# Altium PCB SWC_PCBp1.PcbDoc
Units mm, origin at the board's own origin, x right, y up, seen from the top; angles counter-clockwise.
Board outline 45 x 51 mm, 2 copper layers (Top Layer, Bottom Layer); 74 components, 51 nets, 201 pads, 40 vias.
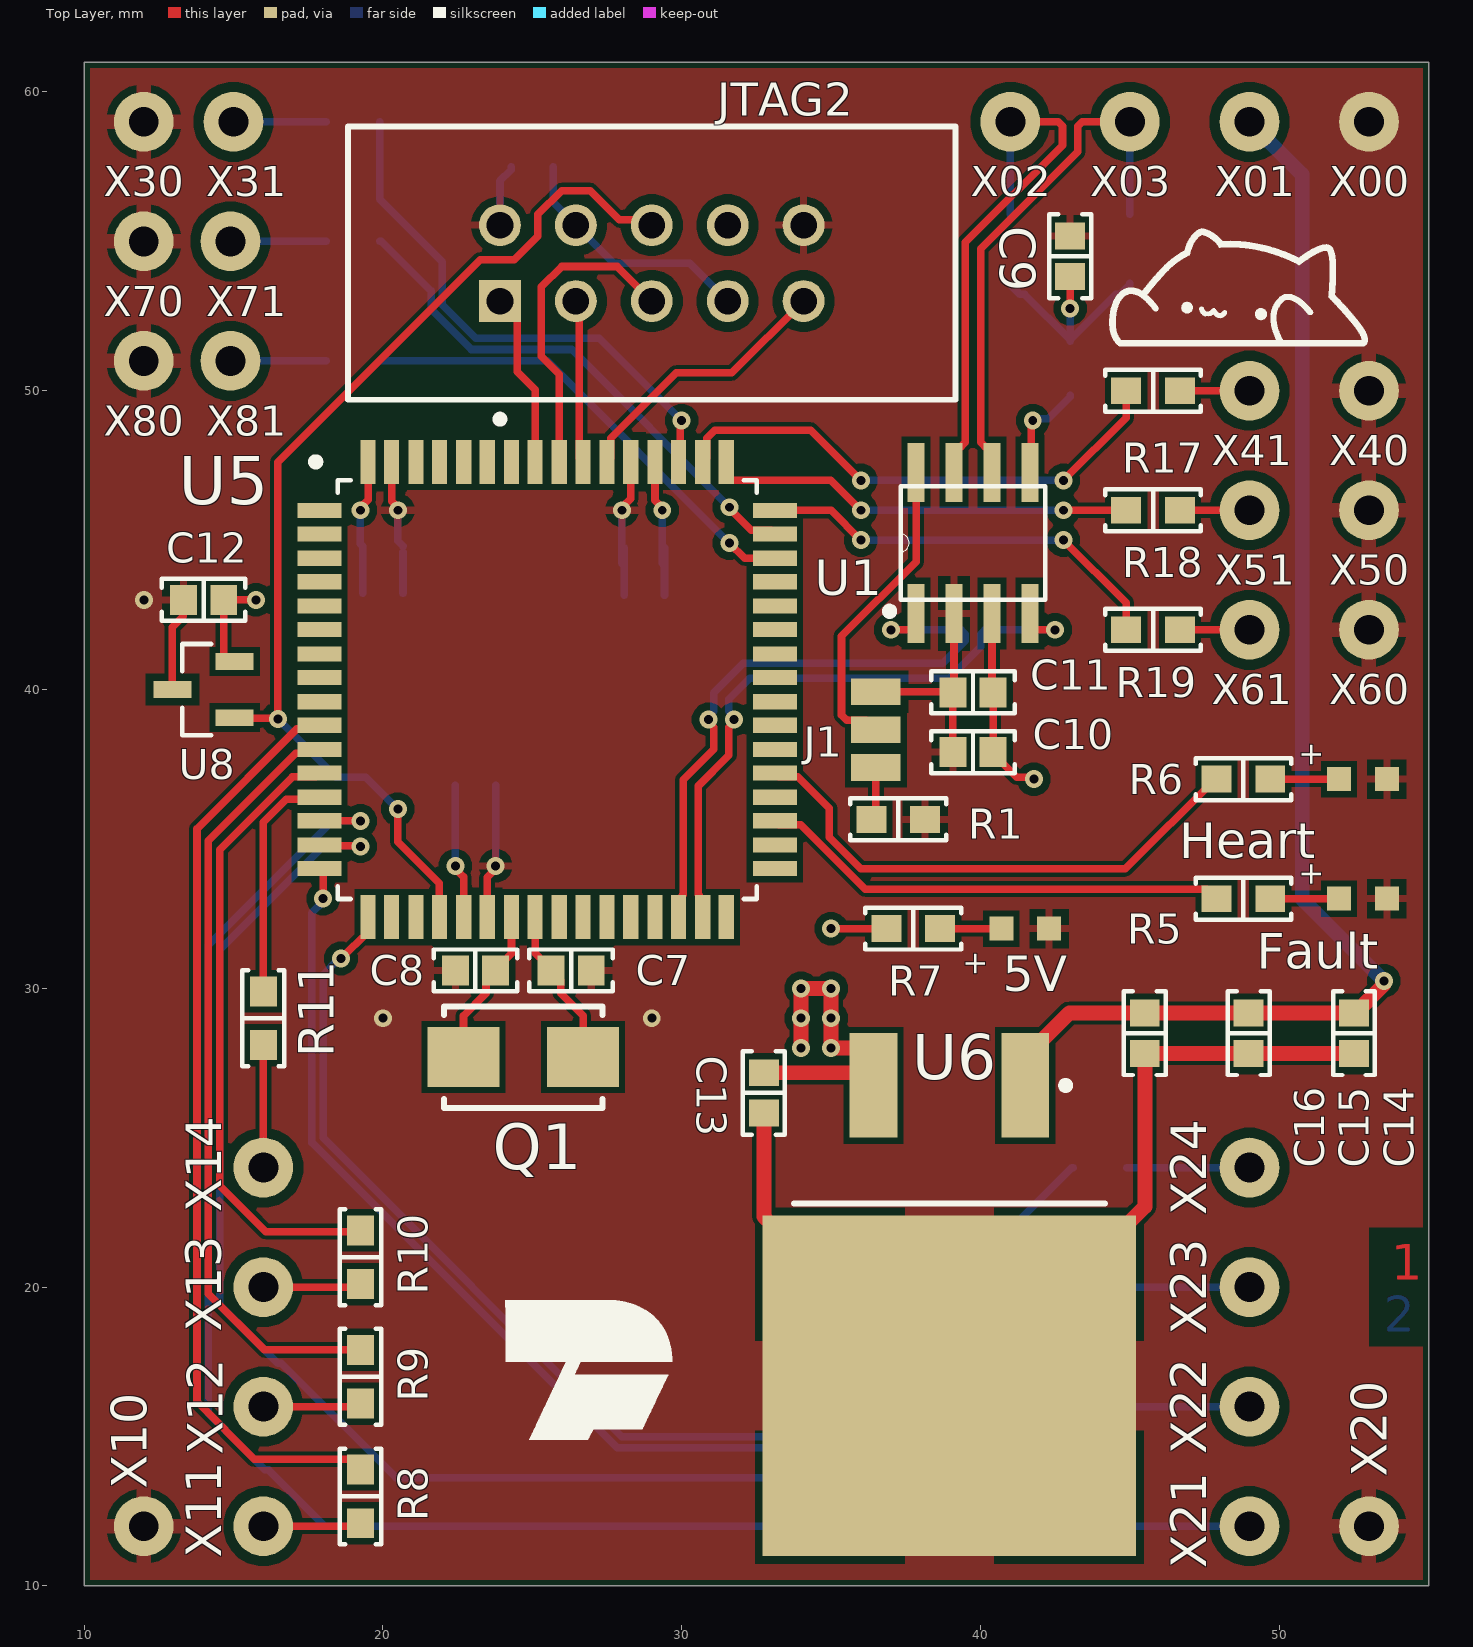
[diagram p0: Top Layer view]
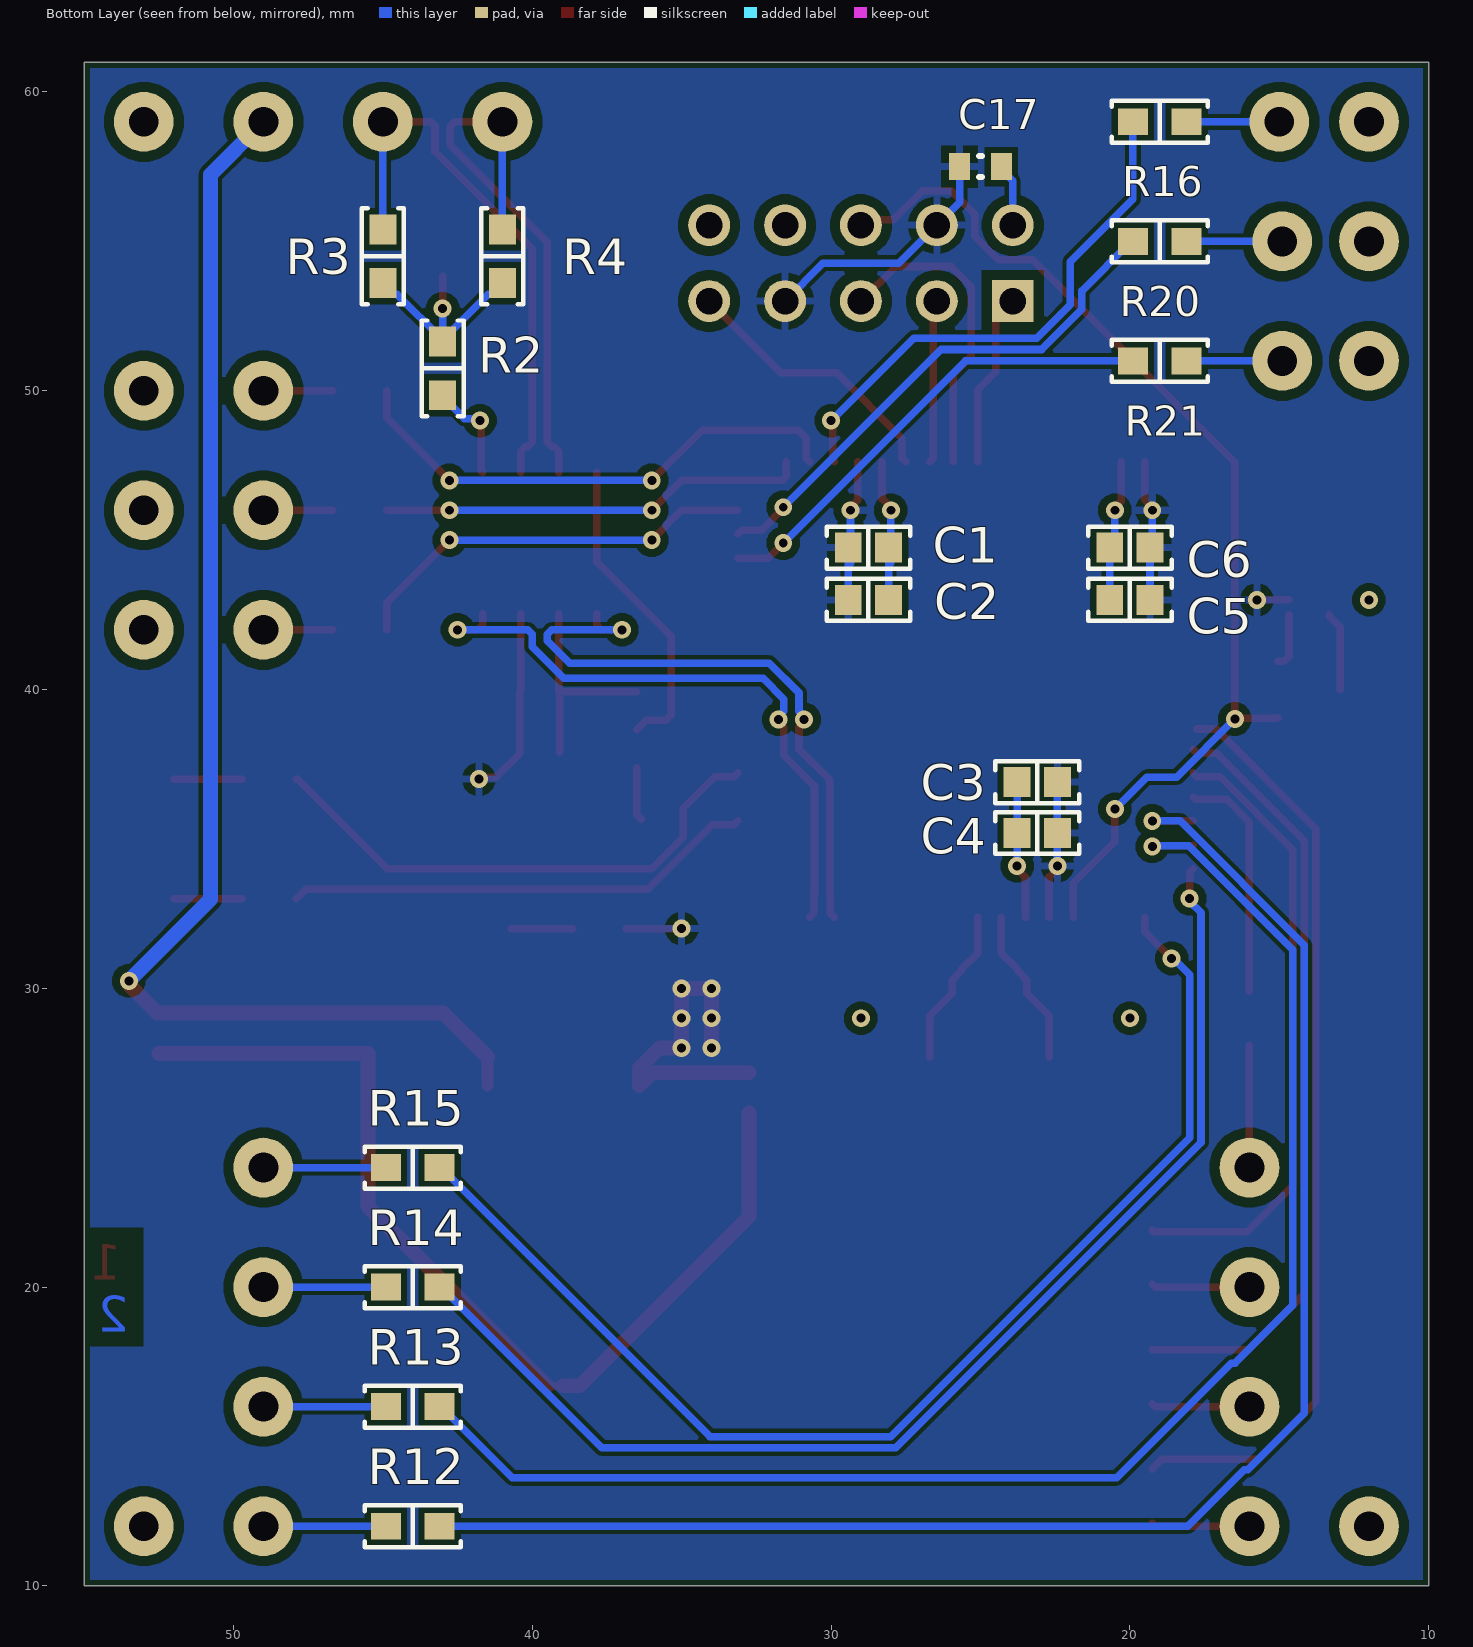
[diagram p1: Bottom Layer view, seen from below]
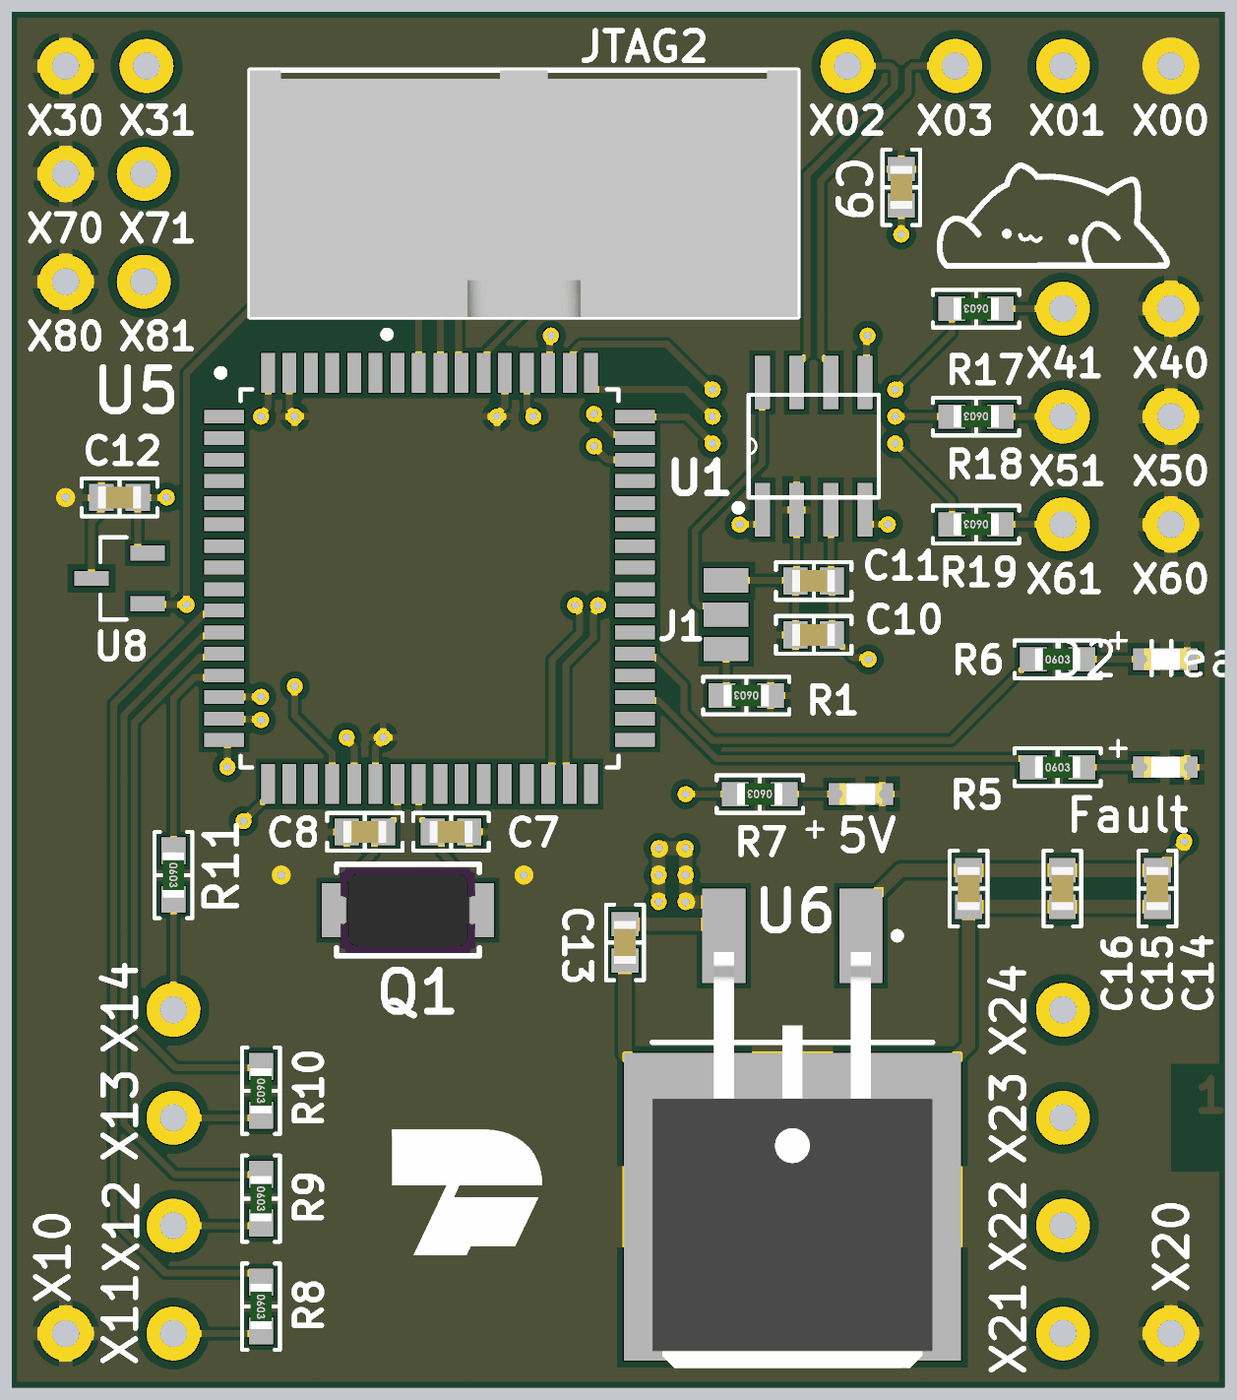
[diagram p2: 3D render of the assembled board from above, using the file's embedded part models]
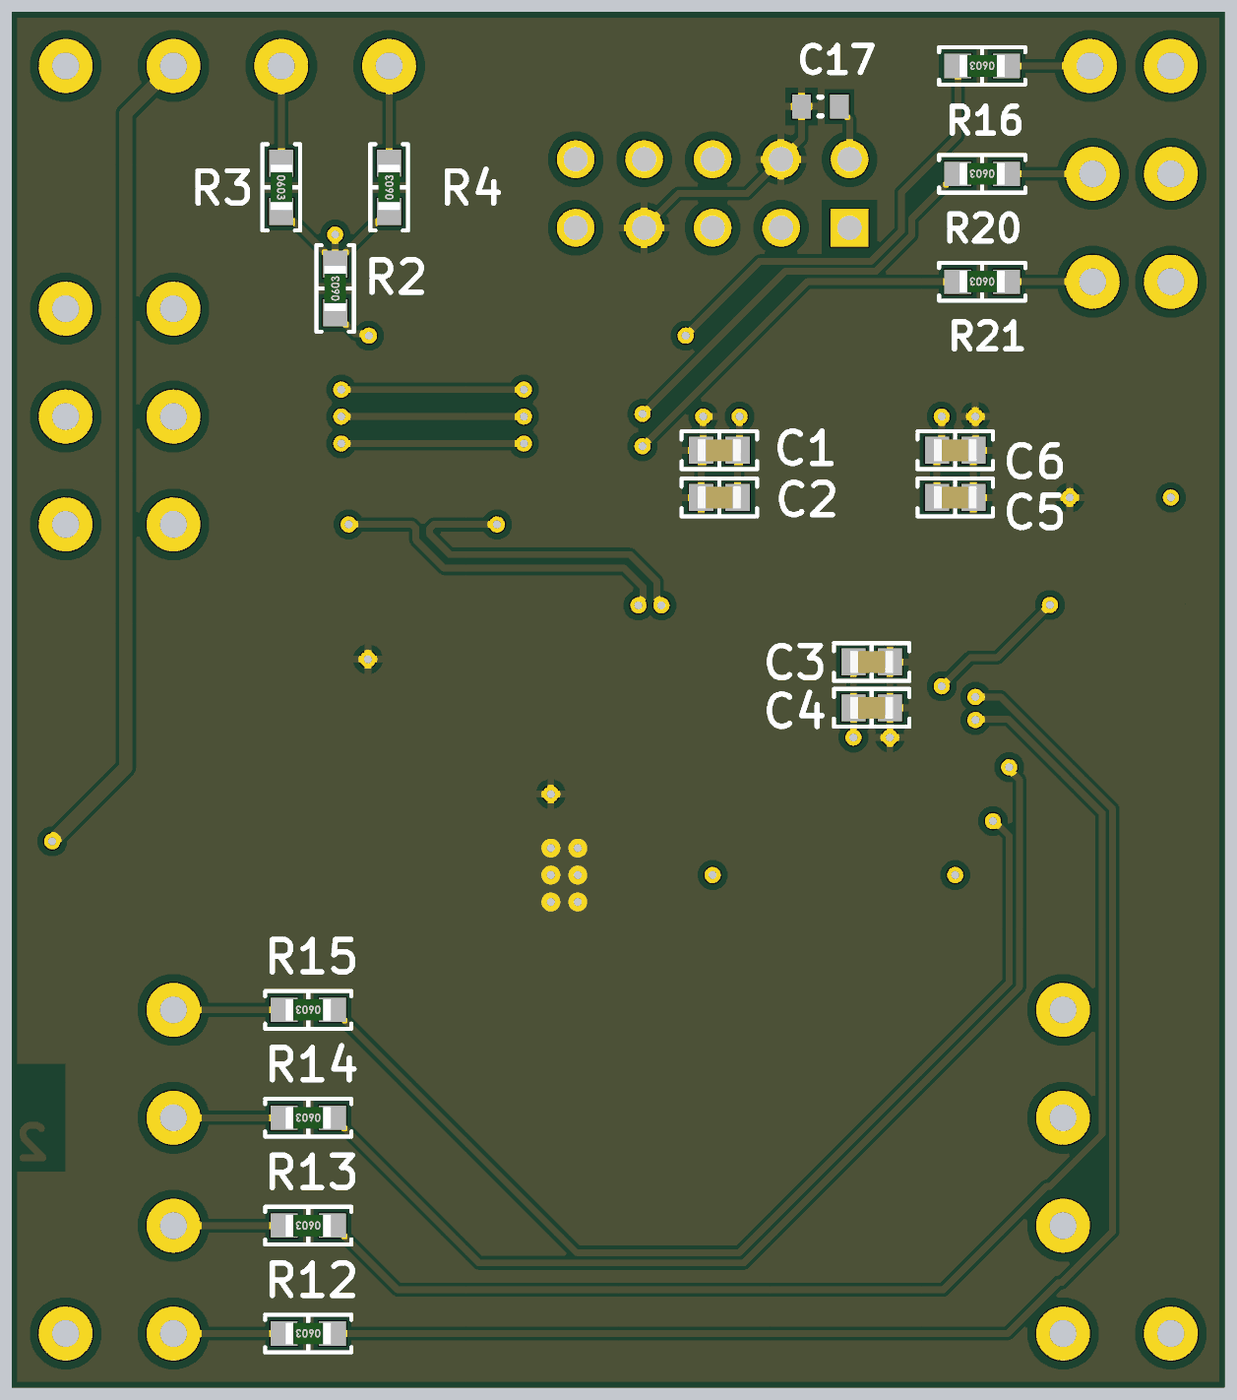
[diagram p3: 3D render of the assembled board from below, using the file's embedded part models]

## Layer stack, top to bottom
Top Solder: solder mask 0.0102, Solder Resist, Dk 3.5
Top Layer: signal copper 0.0356
Dielectric 1: dielectric 0.32, FR-4, Dk 4.8
Bottom Layer: signal copper 0.0356
Bottom Solder: solder mask 0.0102, Solder Resist, Dk 3.5

## Board outline
10,10 55,10 55,61 10,61

## Design rules (kind name [scope] priority, off if disabled: settings)
BoardOutlineClearance [All] p1: gap=0.2 ignorepadtopadclearanceinfootprint=FALSE // Trace to V-cut >0.4mm
Clearance [All] p1: gap=0.254 ignorepadtopadclearanceinfootprint=TRUE except(0: Arc-Hole Track-Hole SMDPad-Hole THPad-Hole Via-Hole Fill-Hole Poly-Hole Region-Hole Text-Hole; 0.127: Arc-Arc Arc-Track Arc-Fill Arc-Poly Arc-Region Track-Track Track-Fill Track-Poly Track-Region SMDPad-SMDPad; 0.15: Arc-Text Track-Text SMDPad-Text THPad-Text Via-Text Fill-Text Poly-Text Region-Text Text-Text; 0.2: Arc-SMDPad Track-SMDPad SMDPad-Fill SMDPad-Poly SMDPad-Region; 0.33: Arc-THPad Track-THPad THPad-Fill THPad-Poly THPad-Region; 0.5: SMDPad-THPad THPad-THPad THPad-Via)
DiffPairsRouting [All] p1: maxlimit=10 minlimit=0.254 mostfreqgap=0.254 toplayer_minwidth=0.127 toplayer_maxwidth=5 toplayer_prefwidth=0.254 bottomlayer_minwidth=0.127 bottomlayer_maxwidth=5 bottomlayer_prefwidth=0.254 maxuncoupledlength=12.7
HoleSize [All] p1: absolutevalues=TRUE maxlimit=6.3 minlimit=0.2 maxpercent=80.000 minpercent=20.000 // Finished hole size tolerance +0.13/-0.08mm
HoleToHoleClearance [All] p1: gap=0.5 allowstackedmicrovias=TRUE
MinimumAnnularRing [All] p1: minimumring=0.13 // 1oz Copper
PolygonConnect [All] p1: connectstyle=Relief reliefconductorwidth=0.254 reliefentries=4 polygonreliefangle="90 Angle" airgapwidth=0.254
RoutingVias [All] p1: holewidth=0.711 width=1.27 viastyle="Through Hole" minholewidth=0.3 minwidth=0.6 maxholewidth=0.711 maxwidth=1.27
SolderMaskExpansion [All] p1: expansion=0.05 istentingtop=FALSE
Width [All] p1: maxlimit=4.5 minlimit=0.127 preferedwidth=0.254 minimp=50.000000 maximp=50.000000 favimp=50.000000
27 further rules are at their usual default settings.

## Classes and differential pairs
component class SWC_P01: 5V C1 C2 C3 C4 C5 C6 C7 C8 C10 C11 C14 C16 Fault Heart J1 JTAG2 Q1 R1 R2 R4 R5 R6 R7 R8 R9 R10 R11 R12 R13 R15 R19 R21 U1 U5 U6 U8 X00 X01 X02 X03 X10 X13 X14 X23 X24 X30 X31 X40 X41 X50 X51 X60 X61 X70 X71 X80 X81
differential pair X_CAN: +X_CAN_P -X_CAN_N
differential pair CAN: +CAN_P -CAN_N

## Components (designator, comment, footprint, x,y, rotation, side; value= is the part's Value field where it differs from the comment)
5V "Green, 3.2V, 150060GS75000" WL-SMCW_0603_H=0.7mm 41.5,32 r180 top (schematic designator D3)
C1 "SMD Capacitor" "CAP 0603/1608" 28.75,44.75 r0 bottom value=1uF
C2 "SMD Capacitor" "CAP 0603/1608" 28.75,43 r0 bottom value=100nF
C3 "SMD Capacitor" "CAP 0603/1608" 23.1,36.9 r180 bottom value=1uF
C4 "SMD Capacitor" "CAP 0603/1608" 23.1,35.2 r180 bottom value=100nF
C5 "SMD Capacitor" "CAP 0603/1608" 20,43 r180 bottom value=1uF
C6 "SMD Capacitor" "CAP 0603/1608" 20,44.75 r180 bottom value=100nF
C7 "SMD Capacitor" "CAP 0603/1608" 26.3,30.6 r180 top value=18pF
C8 "SMD Capacitor" "CAP 0603/1608" 23.1,30.6 r0 top value=18pF
C9 "SMD Capacitor" "CAP 0603/1608" 43,54.5 r90 top value=4u7
C10 "SMD Capacitor" "CAP 0603/1608" 39.75,37.905 r0 top value=100n
C11 "SMD Capacitor" "CAP 0603/1608" 39.75,39.905 r0 top value=100n
C12 "SMD Capacitor" "CAP 0603/1608" 14,43 r180 top value=1uF
C13 "SMD Capacitor" "CAP 0603/1608" 32.75,26.5 r270 top value=100nF
C14 "SMD Capacitor" "CAP 0603/1608" 52.5,28.5 r270 top value=100nF
C15 "SMD Capacitor" "CAP 0603/1608" 48.975,28.5 r270 top value=220nF
C16 "SMD Capacitor" "CAP 0603/1608" 45.5,28.5 r270 top value=10nF
C17 "CAP 100nF 10V 0603(1608)" CAPC0603(1608)100_L 25,57.5 r180 bottom value=100nF
Fault "Red, 2V, 150060RS75000" WL-SMCW_0603_H=0.7mm 52.8,33 r180 top (schematic designator "D1 Fault")
Heart "Blue, 3.2V, 150060BS75000" WL-SMCW_0603_H=0.7mm 52.8,37 r180 top (schematic designator "D2 Heart")
J1 "JUMPERID" SMD-JUMPER-3 36.5,38.655 r270 top net-tie
JTAG2 "5103309-1" TECO-5103309-1_V 29,54.27 r180 top
Q1 "16M" "NDK NX5032GA" 24.7,27.7 r180 top
R1 "SMD Resistor" "STACKPOLE CSR0603" 37.25,35.655 r180 top
R2 "SMD Resistor" "STACKPOLE CSR0603" 43,50.75 r90 bottom value=300
R3 "SMD Resistor" "STACKPOLE CSR0603" 45,54.5 r270 bottom value=60
R4 "SMD Resistor" "STACKPOLE CSR0603" 41,54.5 r90 bottom value=60
R5 "SMD Resistor" "STACKPOLE CSR0603" 48.8,33 r0 top value=1k
R6 "SMD Resistor" "STACKPOLE CSR0603" 48.8,37 r0 top value=1k
R7 "SMD Resistor" "STACKPOLE CSR0603" 37.75,32 r180 top value=1k
R8 "SMD Resistor" "STACKPOLE CSR0603" 19.25,13 r270 top value=10k
R9 "SMD Resistor" "STACKPOLE CSR0603" 19.25,17 r270 top value=10k
R10 "SMD Resistor" "STACKPOLE CSR0603" 19.25,21 r270 top value=10k
R11 "SMD Resistor" "STACKPOLE CSR0603" 16,29 r270 top value=10k
R12 "SMD Resistor" "STACKPOLE CSR0603" 44,12 r0 bottom value=10k
R13 "SMD Resistor" "STACKPOLE CSR0603" 44,16 r0 bottom value=10k
R14 "SMD Resistor" "STACKPOLE CSR0603" 44,20 r0 bottom value=10k
R15 "SMD Resistor" "STACKPOLE CSR0603" 44,24 r0 bottom value=10k
R16 "SMD Resistor" "STACKPOLE CSR0603" 19,59 r0 bottom value=10k
R17 "SMD Resistor" "STACKPOLE CSR0603" 45.775,50 r180 top value=10k
R18 "SMD Resistor" "STACKPOLE CSR0603" 45.775,46 r180 top value=10k
R19 "SMD Resistor" "STACKPOLE CSR0603" 45.775,42 r180 top value=10k
R20 "SMD Resistor" "STACKPOLE CSR0603" 19,55 r0 bottom value=10k
R21 "SMD Resistor" "STACKPOLE CSR0603" 19,51 r0 bottom value=10k
U1 "MCP2551-I/SN" *SOIC127P600X175-8N 39.75,44.905 r90 top
U5 "AT90CAN128-16AI" *QFP80P1600X1600X120-64N 25.5,40 r0 top
U6 "L7805ABD2T-TR" DPAK254P1542X460-3M 38.96,19.45 r270 top
U8 "MCP130T-450I/TT" *SOT95P237X112-3N 14,40 r90 top
X00 "SolderTerminal" SolderTerminal#1 53,59 r0 top
X01 "SolderTerminal" SolderTerminal#1 49,59 r0 top
X02 "SolderTerminal" SolderTerminal#1 41,59 r0 top
X03 "SolderTerminal" SolderTerminal#1 45,59 r0 top
X10 "SolderTerminal" SolderTerminal#1 12,12 r90 top
X11 "SolderTerminal" SolderTerminal#1 16,12 r90 top
X12 "SolderTerminal" SolderTerminal#1 16,16 r90 top
X13 "SolderTerminal" SolderTerminal#1 16,20 r90 top
X14 "SolderTerminal" SolderTerminal#1 16,24 r0 top
X20 "SolderTerminal" SolderTerminal#1 53,12 r0 top
X21 "SolderTerminal" SolderTerminal#1 49,12 r90 top
X22 "SolderTerminal" SolderTerminal#1 49,16 r90 top
X23 "SolderTerminal" SolderTerminal#1 49,20 r90 top
X24 "SolderTerminal" SolderTerminal#1 49,24 r90 top
X30 "SolderTerminal" SolderTerminal#1 12,59 r90 top
X31 "Button_Left" SolderTerminal#1 15,59 r0 top
X40 "SolderTerminal" SolderTerminal#1 53,50 r90 top
X41 "Button_Right" SolderTerminal#2 48.9,50 r0 top
X50 "SolderTerminal" SolderTerminal#1 53,46 r90 top
X51 "Switch1" SolderTerminal#1 49,46 r0 top
X60 "SolderTerminal" SolderTerminal#1 53,42 r90 top
X61 "Switch2" SolderTerminal#1 49,42 r0 top
X70 "SolderTerminal" SolderTerminal#1 12,55 r90 top
X71 "Switch3" SolderTerminal#1 14.9,55 r90 top
X80 "SolderTerminal" SolderTerminal#1 12,51 r90 top
X81 "Switch4" SolderTerminal#1 14.9,51 r90 top

## Footprints (in the part's own frame and the unit in brackets; to place one, negate y for a bottom-side part, rotate by r counter-clockwise, add the part's x,y. Pads: shape width x height; smd on the part's side, far side on the other; paste and mask are expansions set on the pad)
*QFP80P1600X1600X120-64N [mil]
  rect 58x20 smd: 1(-300,236) 2(-300,205) 3(-300,173) 4(-300,142) 5(-300,110) 6(-300,79) 7(-300,47) 8(-300,16) 9(-300,-16) 10(-300,-47) 11(-300,-79) 12(-300,-110) 13(-300,-142) 14(-300,-173) 15(-300,-205) 16(-300,-236) 33(300,-236) 34(300,-205) 35(300,-173) 36(300,-142) 37(300,-110) 38(300,-79) 39(300,-47) 40(300,-16) 41(300,16) 42(300,47) 43(300,79) 44(300,110) 45(300,142) 46(300,173) 47(300,205) 48(300,236)
  rect 20x58 smd: 17(-236,-300) 18(-205,-300) 19(-173,-300) 20(-142,-300) 21(-110,-300) 22(-79,-300) 23(-47,-300) 24(-16,-300) 25(16,-300) 26(47,-300) 27(79,-300) 28(110,-300) 29(142,-300) 30(173,-300) 31(205,-300) 32(236,-300) 49(236,300) 50(205,300) 51(173,300) 52(142,300) 53(110,300) 54(79,300) 55(47,300) 56(16,300) 57(-16,300) 58(-47,300) 59(-79,300) 60(-110,300) 61(-142,300) 62(-173,300) 63(-205,300) 64(-236,300)
  silkscreen extent -310,-276 276,305, body extent -270,-270 270,270, height 30
*SOIC127P600X175-8N [mil]
  rect 78x22 smd: 1(-93,75) 2(-93,25) 3(-93,-25) 4(-93,-75) 5(93,-75) 6(93,-25) 7(93,25) 8(93,75)
  silkscreen extent -95,-95 75,115, body extent -75,-95 75,95, height 80
*SOT95P237X112-3N [mil]
  rect 22x50 smd: 1(-37,-41) 2(37,-41) 3(0,41)
  silkscreen extent -60,-10 60,28, body extent -60,-25 60,25, height 50
"CAP 0603/1608" [mm] "Chip Capacitor, 2-Leads, Body 1.60x0.80mm, IPC Medium Density"
  rect 0.9x1 smd: 1(-0.675,0) 2(0.675,0)
  silkscreen extent -1.4,-0.7 1.4,0.7, body extent -0.8,-0.41 0.8,0.41, height 0.82
CAPC0603(1608)100_L [mm] "Chip Capacitor, Body 1.6x0.8mm, Height 1.0mm, IPC High Density"
  rect 0.7x0.9 smd: 1(-0.7,0) 2(0.7,0)
  silkscreen extent -0.05,-0.35 0.05,0.35, body extent -0.87,-0.47 0.88,0.48, height 1
DPAK254P1542X460-3M [mm] "D2-PAK, 3-Pads, Body 7,78x8,56mm (max), IPC Low Density"
  rect 3.5x1.6 smd: 1(-7.3,2.54) 3(-7.3,-2.54)
  rect 11.4x12.5 smd: 4(2.75,0)
  silkscreen extent -7.42,-5.2 -3.35,5.2, body extent -6.69,-5.2 8.73,5.2, height 4.63
"NDK NX5032GA" [mm] "Crystal, 2-Leads, Body 5.00x3.20mm, IPC Medium Density"
  rect 2.4x2 smd: 1(-2,0) 2(2,0)
  silkscreen extent -2.65,-1.7 2.65,1.7, body extent -2.5,-1.6 2.5,1.6, height 1.2
SMD-JUMPER-3 [mm] "Jumper, SMD"
  rect 0.9x1.65 smd: 1(-1.27,0) 2(0,0) 3(1.27,0)
SolderTerminal#1 [mm]
  round 2 hole 1: 1(0,0)
SolderTerminal#2 [mm]
  round 2 hole 1: 1(0.1,0)
"STACKPOLE CSR0603" [mm] "Chip Resistor, 2-Leads, Body 1.60x0.80mm, IPC Medium Density"
  rect 1x0.9 smd: 1(-0.9,0) 2(0.9,0)
  silkscreen extent -1.6,-0.7 1.6,0.7, body extent -0.85,-0.4 0.85,0.4, height 0.45
TECO-5103309-1_V [mm] "Male Header, 10-Leads, Body 20.32x9.144mm, Pitch 2.54mm"
  rect 1.4x1.4 hole 0.889: 1(5.08,1.27)
  round 1.4 hole 0.889: 2(5.08,-1.27) 3(2.54,1.27) 4(2.54,-1.27) 5(0,1.27) 6(0,-1.27) 7(-2.54,1.27) 8(-2.54,-1.27) 9(-5.08,1.27) 10(-5.08,-1.27)
  silkscreen extent -10.16,-4.57 10.16,5.35, body extent -10.16,-4.57 10.16,4.57, height 9.85
WL-SMCW_0603_H=0.7mm [mm] "SMD Mono-color Chip LED, body 1.6x0.8mm"
  rect 0.8x0.8 smd: 1(-0.8,0) 2(0.8,0)
  body extent -0.8,-0.4 0.8,0.4, height 0.7

## Part data
5V: library part 150060GS75000, "WL-SMCW SMT Mono-color Chip LED Waterclear, size 0603, Green, 3.2V, 140deg", Emitting Color=Green, Forward Voltage typ.=3.2V, Operating Temperature="-40 to +85degC", Chip Technology=InGaN, ComponentLink1Description=Manufacturer, ComponentLink1URL=http://www.we-online.de, ComponentLink2Description=Datasheet, ComponentLink2URL=https://www.we-online.com/catalog/datasheet/150060GS75000.pdf, Dominant Wavelength typ.=525nm, Luminous Intensity typ.=430mcd, Mounting Technology=SMT, Packaging="Tape and Reel", Part Number=150060GS75000, Peak Wavelength typ.=515nm, Published Date="December 2019", Publisher="Wurth Elektronik", Size=0603, Viewing Angle=140deg
C1 C2 C3 C4 C5 C6 C7 C8 C9 C10 C11 C12 C13 C14 C15 C16: "Capacitor with multiple Footprints"
C17: library part CMP-1035-02579-1, "CAP 100nF 10V ±5% 0603 (1608 Metric) Thickness 1mm SMD", Case-EIA=0603, Case-Metric=1608, Rated Voltage="10 V", Tolerance=Â±5%, Max Thickness="1 mm", Technology=SMT
Fault: library part 150060RS75000, "WL-SMCW SMT Mono-color Chip LED Waterclear, size 0603, Red, 2V, 140deg", Emitting Color=Red, Forward Voltage typ.=2V, Operating Temperature="-40 to +85degC", Chip Technology=AlInGaP, ComponentLink1Description=Manufacturer, ComponentLink1URL=http://www.we-online.de, ComponentLink2Description=Datasheet, ComponentLink2URL=https://www.we-online.com/catalog/datasheet/150060RS75000.pdf, Dominant Wavelength typ.=625nm, Luminous Intensity typ.=250mcd, Mounting Technology=SMT, Packaging="Tape and Reel", Part Number=150060RS75000, Peak Wavelength typ.=630nm, Published Date="December 2019", Publisher="Wurth Elektronik", Size=0603, Viewing Angle=140deg
Heart: library part 150060BS75000, "WL-SMCW SMT Mono-color Chip LED Waterclear, size 0603, Blue, 3.2V, 140deg", Emitting Color=Blue, Forward Voltage typ.=3.2V, Operating Temperature="-40 to +85degC", Chip Technology=InGaN, ComponentLink1Description=Manufacturer, ComponentLink1URL=http://www.we-online.de, ComponentLink2Description=Datasheet, ComponentLink2URL=https://www.we-online.com/catalog/datasheet/150060BS75000.pdf, Dominant Wavelength typ.=470nm, Luminous Intensity typ.=145mcd, Mounting Technology=SMT, Packaging="Tape and Reel", Part Number=150060BS75000, Peak Wavelength typ.=465nm, Published Date="December 2019", Publisher="Wurth Elektronik", Size=0603, Viewing Angle=140deg
J1: library part "SMD Jumper 3"
JTAG2: library part CMP-2000-07502-1, "Male Header, Pitch 2.54 mm, 2 x 5 Position, Height 9.855 mm, Tail Length 3.048 mm, -65 to 105 degC, RoHS, Tube", Colour=Black, Current Rating=1A, Flammability Rating=UL94V-0, Insulation Resistance=5GR, Manufacturer="TE Connectivity", Max Operating Temperature=105degC, Min Operating Temperature=-65degC, Package Description="Male Header, Pitch 2.54 mm, 2 x 5 Position, Height 9.855 mm, Tail Length 3.048 mm", Package Quantity=35, Board Standoff=Yes(With), Body Material=Thermoplastic, Connector System=Wire-to-Board, Connector Type=Header, Contact Gender=Male, Contact Material=CopperAlloy, Contact Mating Length=0.24inch, Contact Plating=Gold, Contact Shape=Square, Datasheet URL=http://www.te.com/commerce/DocumentDelivery/DDEController?Action=showdoc&DocId=Customer+Drawing%7F5103309%7FE1%7Fpdf%7FEnglish%7FENG_CD_5103309_E1.pdf%7F5103309-1, Datasheet Version="Rev. E1, 03/2011", Depth=9.14mm, ELV=Compliant, Gender=Male, Height=8.813mm, Housing Colour=Black, Housing Material=PBT, Lead Free=LeadFree, Length=0.8inch, Manufacturer URL=http://www.te.com/, Mating Alignment=Yes(With), Mating Connector Lock=No(Without), Mating Retention=No(Without), Max Current Rating=1A, Mount=ThroughHole, Mounting Technology=ThroughHole, Number Of Contacts=10, Number of Positions=10, Number of Rows=2, Orientation=Straight, Package Reference=5103309-1, Packaging=Rail/Tube, Panel Mount Retention=No(Without), PCB Mount Alignment=No(Without), PCB Mount Retention=Without, PCB Mounting Orientation=Vertical, Pitch=2.54mm, REACH SVHC=NoSVHC, RoHSCompliant=True, Row Spacing=2.54mm, Shrouded=Yes(With), Shrouded End Dimension=3.81mm, Termination=ThroughHole, Termination Post Length=0.12inch
Q1: library part "16 MHz Quartz", "16 MHz Quartz"
R1 R2 R3 R4 R5 R6 R7 R8 R9 R10 R11 R12 R13 R14 R15 R16 R17 R18 R19 R20 R21: "Resistor with multiple footprints"
U1: "MCP2551 Series 5.5 V 1 Mb/s Surface Mount High-Speed CAN Transceiver - SOIC-8", Package="SOIC-8 Microchip", Availability=Unavailable, MF=Microchip, MP=MCP2551-I/SN, Price=None, SnapEDA_Link=https://www.snapeda.com/parts/MCP2551-I/SN/Microchip/view-part/?ref=snap
U5: "Ic Mcu 8bit 128kb Flash 64tqfp", Package="TQFP-64 Microchip", Availability=Unavailable, MF=Microchip, MP=AT90CAN128-16AI, Price=None, SnapEDA_Link=https://www.snapeda.com/parts/AT90CAN128-16AI/Microchip/view-part/?ref=snap
U6: "Linear Voltage Regulators 5.0V 1.5A Positive"
U8: "System Supervisors - Power Supply Monitors with Reset Generators Open Drain Low", Package="SOT-23-3 Microchip", Availability=Unavailable, MF=Microchip, MP=MCP120T-450I/TT, Price=None, SnapEDA_Link=https://www.snapeda.com/parts/MCP120T-450I/TT/Microchip/view-part/?ref=snap
X31 X41 X51 X61 X71 X81: library part SolderTerminal

## Via types
v1: diameter 0.6, hole 0.3, Top Layer to Bottom Layer, 40 vias

## Nets (pads, with @x,y where several pads share a name; then routed paths per layer and width w, separated by ;. In a path a pad name is that pad's centre, name@x,y a point inside that pad or via, vN(x,y) a via of type N, cw(c..) or ccw(c..) an arc to the next point about the centre after c; other vN are vias at no path point)
+5V: C1.2 C2.2 C3.2 C4.2 C5.2 C6.2 C10.2 C11.2 C12.1 C13.1 C17.1 JTAG2.4 JTAG2.7 R7.2 U1.3 U5.21 U5.52 U5.64 U6.3 U8.2 | length 44.9
  Top Layer w0.254: 14.675,42.5 14.675,41.092 14.827,40.94 U8.2 ; C12.1 v1(15.75,43) ; v1(19.25,46) 19.25,46.094 19.506,46.349 U5.64 ; v1(22.425,34.1) 22.425,34.006 22.706,33.725 U5.21 ; U5.52 29.107,46.337 29.35,46.094 v1(29.35,46) ; v1(35,32) R7.2 ; U1.3 40.385,39.945 C11.2 C10.2 40.425,37.855 41.214,37.066 41.721,37.066 v1(41.787,37)
  Top Layer w0.5: C13.1 35.995,27.175 U6.3 36.42,27.327 35.747,28 v1(35,28) v1(35,29) v1(35,30) v1(34,30) v1(34,29) v1(34,28)
  Bottom Layer w0.254: v1(19.25,46) 19.25,44.875 19.325,44.8 C5.2@19.325,43.225 ; v1(22.425,34.1) C4.2 C3.2@22.425,36.8 ; C17.1 25.7,56.309 26.46,55.549 JTAG2.4 27.73,54.27 30.27,54.27 JTAG2.7 ; v1(29.35,46) 29.35,44.225 29.375,44.2 ; C2.2@29.425,43.15 C1.2
+24V: C14.1 C15.1 C16.1 U6.1 X01.1 | length 44.7
  Top Layer w0.4: U6.1 U6.1@41.5,27.7
  Top Layer w0.5: U6.1@41.5,27.7 42.975,29.175 C16.1 C15.1 52.55,29.175 53.481,30.106 53.481,30.231 v1(53.5,30.25)
  Bottom Layer w0.5: X01.1 50.769,57.231 50.769,32.981 v1@53.481,30.269
CAN_N: R3.1 U1.6 X03.1 | length 18
  Top Layer w0.254: U1.6 40.385,47.978 40.233,48.131 40.153,48.131 40.004,48.28 40.004,54.754 43.254,58.004 43.254,58.851 43.403,59 X03.1
  Bottom Layer w0.254: R3.1@45,55.9 X03.1
CAN_P: R4.2 U1.7 X02.1 | length 18
  Top Layer w0.254: U1.7 39.115,47.978 39.267,48.131 39.347,48.131 39.496,48.28 39.496,54.964 42.746,58.214 42.746,58.851 42.597,59 X02.1
  Bottom Layer w0.254: R4.2@41,55.9 X02.1
GND: 5V.1 C1.1 C2.1 C3.1 C4.1 C5.1 C6.1 C7.1 C8.1 C9.2 C10.1 C11.1 C12.2 C13.2 C14.2 C15.2 C16.2 C17.2 Fault.1 Heart.1 J1.1 JTAG2.2 JTAG2.10 R1.1 U1.2 U5.22 U5.53 U5.63 U6.4 U8.3 X00.1 X10.1 X20.1 X30.1 X40.1 X50.1 X60.1 X70.1 X80.1 | length 59.2
  Top Layer w0.254: U8.3 12.959,42.084 13.325,42.45 13.325,42.5 ; U5.63 20.293,46.301 20.5,46.094 v1(20.5,46) ; U5.22 23.493,33.725 23.775,34.006 v1(23.775,34.1) ; v1(28,46) 28,46.094 28.294,46.388 U5.53 ; J1.1 39.055,39.925 C11.1 ; U6.4 U6.4@39.51,16.7 ; C10.1 C11.1 ; U1.2 39.115,39.945 C11.1
  Top Layer w0.5: C13.2 32.75,22.36 38.41,16.7 U6.4 ; U6.4@39.51,16.7 45.5,22.69 C16.2 C15.2 C14.2
  Bottom Layer w0.254: v1(20.5,46) 20.5,44.975 C6.1@20.675,44.8 ; C5.1@20.675,43.225 C6.1@20.675,44.6 ; v1(23.775,34.1) C4.1 C3.1@23.775,36.8 ; JTAG2.2 23.92,57.02 24.3,57.4 C17.2 ; v1(28,46) 28,44.225 28.025,44.2 ; C2.1@28.075,43.15 C1.1
  other v1: 20,29 29,29 12,43
JTAG_TCK: JTAG2.1 U5.57 | length 5.9
  Top Layer w0.254: JTAG2.1 24.493,52.427 24.493,50.629 25.094,50.028 U5.57
JTAG_TDI: JTAG2.9 U5.54 | length 9.2
  Top Layer w0.254: U5.54 27.634,47.747 27.634,48.413 29.818,50.597 31.677,50.597 JTAG2.9
JTAG_TDO: JTAG2.3 U5.55 | length 5.5
  Top Layer w0.254: JTAG2.3 26.577,52.883 26.577,47.737 U5.55
JTAG_TMS: JTAG2.5 U5.56 | length 10.6
  Top Layer w0.254: U5.56 25.906,50.553 25.303,51.156 25.303,53.479 25.981,54.157 27.843,54.157 JTAG2.5
NetC7_2: C7.2 Q1.1 U5.24 | length 5.3
  Top Layer w0.254: U5.24 25.094,31.181 25.625,30.65 C7.2 25.948,30.277 25.948,29.833 26.7,29.081 Q1.1
NetC8_2: C8.2 Q1.2 U5.23 | length 5.3
  Top Layer w0.254: Q1.2 22.7,29.081 23.452,29.833 23.452,30.277 C8.2 23.775,30.65 24.306,31.181 U5.23
NetC9_1: C9.1 R2.2 R3.2 R4.1 | length 7.8
  Top Layer w0.254: v1(43,52.75) C9.1
  Bottom Layer w0.254: R4.1 41,53.55 41.323,53.227 41.473,53.227 R2.2@43,51.7 ; R2.2 R2.2@43,51.7 ; v1(43,52.75) R2.2@43,51.7 ; R3.2 45,53.55 44.677,53.227 44.527,53.227 R2.2@43,51.7
"NetD1 Fault_2": Fault.2 R5.2 | length 2.3
  Top Layer w0.254: R5.2 Fault.2
"NetD2 Heart_2": Heart.2 R6.2 | length 2.3
  Top Layer w0.254: R6.2 Heart.2
NetD3_2: 5V.2 R7.1 | length 2
  Top Layer w0.254: R7.1 5V.2
NetJ1_2: J1.2 U1.8 | length 10.5
  Top Layer w0.254: J1.2 36.177,38.978 35.522,38.978 35.5,39 35.497,39 35.348,39.149 35.348,41.778 37.845,44.275 U1.8
NetJ1_3: J1.3 R1.2 | length 1.8
  Top Layer w0.254: R1.2 36.5,35.805 J1.3
NetR2_1: R2.1 U1.5 | length 3.4
  Top Layer w0.254: U1.5 41.702,47.315 41.702,48.953 v1(41.75,49)
  Bottom Layer w0.254: v1(41.75,49) 41.816,49.066 42.266,49.066 43,49.8 R2.1
NetR5_1: R5.1 U5.35 | length 15.9
  Top Layer w0.254: U5.35 33.247,35.479 33.982,35.479 36.138,33.323 47.577,33.323 R5.1
NetR6_1: R6.1 U5.37 | length 17.9
  Top Layer w0.254: U5.37 33.247,37.079 33.887,37.079 34.944,36.023 34.944,35.056 36,34 44.85,34 47.85,37 R6.1
NetR8_2: R8.2 X11.1 | length 3.3
  Top Layer w0.254: X11.1 19.15,12 R8.2
NetR9_2: R9.2 X12.1 | length 3.3
  Top Layer w0.254: X12.1 19.15,16 R9.2
NetR10_2: R10.2 X13.1 | length 3.3
  Top Layer w0.254: X13.1 19.15,20 R10.2
NetR11_2: R11.2 X14.1 | length 4.1
  Top Layer w0.254: X14.1 R11.2
NetR12_2: R12.2 X21.1 | length 4.1
  Bottom Layer w0.254: R12.2 X21.1
NetR13_2: R13.2 X22.1 | length 4.1
  Bottom Layer w0.254: R13.2 X22.1
NetR14_2: R14.2 X23.1 | length 4.1
  Bottom Layer w0.254: R14.2 X23.1
NetR15_2: R15.2 X24.1 | length 4.1
  Bottom Layer w0.254: R15.2 X24.1
NetR16_1: R16.1 X31.1 | length 3.1
  Bottom Layer w0.254: X31.1 R16.1
NetR16_2: R16.2 U5.51 | length 18
  Top Layer w0.254: U5.51 29.947,47.673 29.947,48.947 v1(30,49)
  Bottom Layer w0.254: R16.2 19.9,56.412 21.994,54.318 21.994,52.879 23.112,51.762 27.238,51.762 v1(30,49)
NetR17_1: R17.1 X41.1 | length 2.3
  Top Layer w0.254: R17.1 X41.1
NetR17_2: R17.2 U5.50 | length 17.5
  Top Layer w0.254: U5.50 30.834,47.747 30.834,48.413 31.105,48.684 34.316,48.684 v1(36,47) ; v1(42.775,47) 44.875,49.1 R17.2
  Bottom Layer w0.254: v1(36,47) v1(42.775,47)
NetR18_1: R18.1 X51.1 | length 2.3
  Top Layer w0.254: R18.1 X51.1
NetR18_2: R18.2 U5.49 | length 14.3
  Top Layer w0.254: U5.49 31.494,47.137 31.621,47.01 34.99,47.01 v1(36,46) ; v1(42.775,46) R18.2
  Bottom Layer w0.254: v1(36,46) v1(42.775,46)
NetR19_1: R19.1 X61.1 | length 2.3
  Top Layer w0.254: R19.1 X61.1
NetR19_2: R19.2 U5.48 | length 13.9
  Top Layer w0.254: U5.48 35.006,45.994 v1(36,45) ; v1(42.775,45) 44.875,42.9 R19.2
  Bottom Layer w0.254: v1(36,45) v1(42.775,45)
NetR20_1: R20.1 X71.1 | length 3.2
  Bottom Layer w0.254: X71.1 R20.1
NetR20_2: R20.2 U5.47 | length 17.7
  Top Layer w0.254: v1(31.6,46.1) 31.6,46.061 32.327,45.334 32.993,45.334 U5.47
  Bottom Layer w0.254: R20.2 19.95,55 21.613,53.337 21.613,52.721 22.954,51.381 26.319,51.381 v1(31.6,46.1)
NetR21_1: R21.1 X81.1 | length 3.2
  Bottom Layer w0.254: X81.1 R21.1
NetR21_2: R21.2 U5.46 | length 16
  Top Layer w0.254: v1(31.6,44.9) 32.106,44.394 U5.46
  Bottom Layer w0.254: R21.2 25.5,51 v1(31.6,44.9)
RE1.1: R8.1 U5.10 | length 31
  Top Layer w0.254: U5.10@17.753,38.679 17.113,38.679 13.781,35.347 13.781,16.158 15.699,14.241 18.927,14.241 19.25,13.918 R8.1
RE1.2: R9.1 U5.11 | length 26
  Top Layer w0.254: U5.11 17.753,37.866 17.087,37.866 14.162,34.941 14.162,19.777 16.039,17.9 R9.1
RE1.3: R10.1 U5.12 | length 21
  Top Layer w0.254: U5.12 17.753,37.079 16.977,37.079 14.543,34.645 14.543,23.396 16.08,21.86 19.21,21.86 R10.1
RE1.4: R11.1 U5.13 | length 7.9
  Top Layer w0.254: R11.1 16,35.563 16.762,36.325 17.812,36.325 U5.13
RE2.1: R12.1 U5.14 | length 54.4
  Top Layer w0.254: U5.14 17.881,35.605 v1@19.249,35.605 ; v1@19.249,35.605 v1(19.25,35.604)
  Bottom Layer w0.254: v1(19.25,35.604) 18.319,35.604 14.162,31.447 14.162,15.777 16.051,13.889 16.172,13.889 18.061,12 R12.1
RE2.2: R13.1 U5.15 | length 51.4
  Top Layer w0.254: U5.15 17.902,34.772 19.228,34.772 v1(19.25,34.75)
  Bottom Layer w0.254: v1(19.25,34.75) 19.225,34.775 18.029,34.775 14.543,31.289 14.543,19.396 16.482,17.457 16.604,17.457 20.442,13.619 40.669,13.619 43.05,16 R13.1
RE2.3: R14.1 U5.16 | length 41.3
  Top Layer w0.254: U5.16 18,33.886 v1(18,33)
  Bottom Layer w0.254: v1(18,33) 18,32.906 17.619,32.525 17.619,24.842 27.842,14.619 37.669,14.619 43.05,20 R14.1
RE2.4: R15.1 U5.17 | length 41
  Top Layer w0.254: v1(18.6,31) 18.608,31 19.506,31.897 U5.17
  Bottom Layer w0.254: v1(18.6,31) 18.543,31 18,30.457 18,25 28,15 34.05,15 43.05,24 R15.1
Reset_uC: JTAG2.6 U5.20 U8.1 | length 36.7
  Top Layer w0.254: U8.1 15.064,39.037 16.463,39.037 v1(16.485,39.015) 16.485,47.612 23.257,54.383 24.399,54.383 25.19,55.174 25.19,55.906 25.981,56.697 26.939,56.697 27.919,55.717 28.823,55.717 JTAG2.6 ; v1(20.5,36) 20.5,34.906 21.893,33.513 U5.20
  Bottom Layer w0.254: v1(16.485,39.015) 18.434,37.066 19.434,37.066 v1(20.5,36)
X_CAN_N: U1.1 U5.30 | length 21
  Top Layer w0.254: U5.30 30.021,32.507 30.021,33.113 30.047,33.138 30.047,36.982 31.073,38.008 31.073,38.733 ; v1(37,42) 37.693,42 37.845,42.152 U1.1
  Bottom Layer w0.254: v1(30.9,39) 30.9,39.094 31.073,39.267 31.073,39.891 32.066,40.884 38.739,40.884 39.496,41.641 39.496,41.851 39.347,42 v1(37,42)
X_CAN_P: U1.4 U5.31 | length 21
  Top Layer w0.254: U5.31 30.58,32.507 30.58,33.113 30.555,33.138 30.555,36.772 31.581,37.798 31.581,38.733 ; U1.4 41.655,42.152 41.807,42 v1(42.5,42)
  Bottom Layer w0.254: v1(31.754,39) 31.754,39.094 31.581,39.267 31.581,39.681 32.276,40.376 38.95,40.376 40.004,41.43 40.004,41.851 40.153,42 v1(42.5,42)
pads on no net: JTAG2.8 U5.1 U5.2 U5.3 U5.4 U5.5 U5.6 U5.7 U5.8 U5.9 U5.18 U5.19 U5.25 U5.26 U5.27 U5.28 U5.29 U5.32 U5.33 U5.34 U5.36 U5.38 U5.39 U5.40 U5.41 U5.42 U5.43 U5.44 U5.45 U5.58 U5.59 U5.60 U5.61 U5.62

## Polygon pours and split planes (outlines as drawn)
+5V on Bottom Layer "+5V_L02_P002" (solid, remove dead copper, pour order 2): 55,10 10,10 10,61 55,61 55,41
GND on Top Layer "GND_L01_P001" (solid, remove dead copper, pour order 1): 10,61 55,61 55,10 10,10

## Other copper
Top Layer:
  pour cut-out: 53,22 53,18 55,18 55,22
  text "1" at 53.754,20.254 h1.2
Bottom Layer:
  pour cut-out: 53,22 53,18 55,18 55,22
  text "2" at 53.504,18.504 h1.2

## Silkscreen, mask and mechanical layers (free items; w line width, h text height)
Top Overlay:
  drawing of 5 lines, arcs and shapes, not listed
Boardoutline:
  the board outline again, w0.254

## Text inside footprints (layer, text, board x,y; h text height)
5V: Top Overlay "+" at 39.5,31.25 h0.76 r270
Fault: Top Overlay "+" at 50.75,34.25 h0.76 r270
Heart: Top Overlay "+" at 50.75,38.25 h0.76 r270